# EAGLE board Add-OnV15 (EAGLE 6.3)
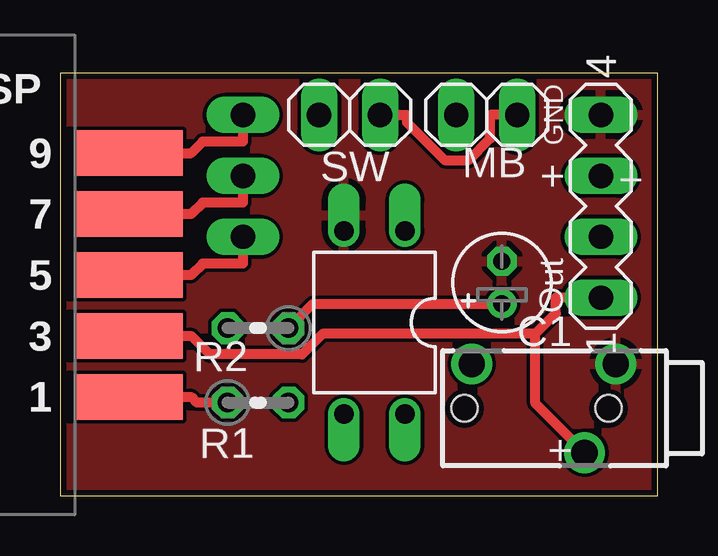
[diagram p0: board, top side]
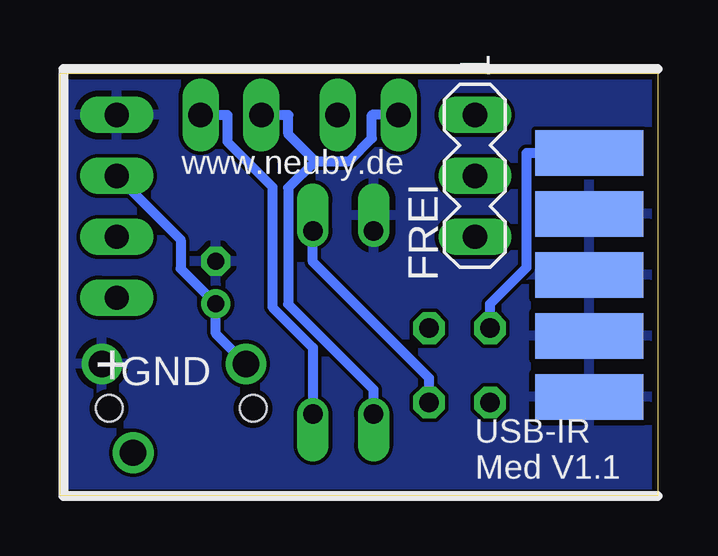
[diagram p1: board, bottom side, seen from below]

Size 24.91 x 17.61 mm. Coordinates in mm from the lower left corner, seen from the top.
Outline: 0,0 24.91,0 24.91,17.61 0,17.61 0,0
Copper layers (1*16): Top 0.035mm / dielectric 1.5mm / Bottom 0.035mm
Design rules "Fusion_eagle_rule_v1.1": minimum track width 6mil, minimum drill 12mil, track to track 6mil, track to pad 6mil, pad to pad 6mil, via to via 6mil, smd to smd 0mil, copper to edge 10mil, drill to drill 10mil, minimum pad ring 10mil, minimum via ring 6mil, stop-mask expansion 2mil, vias tented up to drill 100mil, thermal gap 10mil
Net classes: 0 default: width 0.406 mm

## Footprints (pad centres in the part's own frame; a part is rotated, then mirrored left to right if it is on the bottom)
CON2X5EDGE = smd 4.5 x 1.9: P$1 0,5.08; P$3 0,2.54; P$5 0,0; P$7 0,-2.54; P$9 0,-5.08 | smd 4.5 x 1.9 bottom: P$2 0,5.08; P$4 0,2.54; P$6 0,0; P$8 0,-2.54; P$10 0,-5.08
E1,8-4 = drill 0.711 pad 1.168: + -0.889,0 | drill 0.711 pad 1.168 octagon: - 0.889,0
MA03-1 = drill 1.016 long: 1 -2.54,0; 2 0,0; 3 2.54,0
1X02 = drill 1.016 long: 1 -1.27,0; 2 1.27,0
DIL04 = drill 0.813 offset: 1 -1.27,-3.81; 2 1.27,-3.81; 3 1.27,3.81; 4 -1.27,3.81
0204V = drill 0.813 octagon: 1 -1.27,0; 2 1.27,0
MA04-1 = drill 1.016 long: 1 -3.81,0; 2 -1.27,0; 3 1.27,0; 4 3.81,0
1501_03 = drill 1.1 pad 1.7: 1 -1.85,0.3; 2 1.85,-1; 3 -1.85,-5.7 | hole 1.1: 0,0; 0,-6

## Placement (x,y rotation side)
2USB-ASP  CON2X5EDGE  [CON2X5EDGE]  2.86,9.21 180 top
C1  4,7uF  [E1,8-4]  18.41,8.89 90 top
FREI  [MA03-1]  7.62,13.34 270 bottom
MB  [1X02]  17.78,15.88 0 top
OK2  PC817  [DIL04]  13.1,7.22 180 top
R1  100  [0204V]  8.26,3.89 0 top
R2  560  [0204V]  8.26,6.99 180 top
SV1  [MA04-1]  22.54,12.06 90 top
SW  [1X02]  12.06,15.88 180 top
X1  1501_03  [1501_03]  22.86,3.65 270 top

## Library data of the parts
2USB-ASP = schwen
C1 R1 R2 = rcl
FREI SV1 = con-lstb; OC_FARNELL: unknown; OC_NEWARK: unknown
MB SW = pinhead
OK2 = optocoupler; MPN: PC817X4J000F; OC_FARNELL: 9707727; OC_NEWARK: 97K7059
X1 = con-lumberg; OC_FARNELL: 1200127; OC_NEWARK: unknown

## Nets
GND: 2USB-ASP.P$2 2USB-ASP.P$4 2USB-ASP.P$6 2USB-ASP.P$8 C1.- OK2.2 SV1.4 X1.1
MISO: 2USB-ASP.P$1 R1.1
MOSI: 2USB-ASP.P$9 FREI.1
N$1: C1.+ R2.1 SV1.3 X1.3
N$2: OK2.1 R1.2
N$3: MB.2 OK2.4 SW.1
N$4: MB.1 OK2.3 SW.2
NC: 2USB-ASP.P$7 FREI.2
RST: 2USB-ASP.P$5 FREI.3
SCK: 2USB-ASP.P$3 SV1.1 X1.2
VCC: 2USB-ASP.P$10 R2.2

## Tracks (layer width: path | path; a pad name or v marks a point on that pad's centre or on a via)
GND
  pour Bottom: 0,17.78 0,0 24.77,0 24.77,17.78
  pour Top: 0,17.78 24.77,17.78 24.77,0 0,0
MISO
  Top 0.406: 2USB-ASP.P$1 5.47,4.12 5.7,3.89 R1.1
MOSI
  Top 0.406: 2USB-ASP.P$9 5.47,14.29 5.94,14.76 7.62,14.76 FREI.1
N$1
  Top 0.406: R2.1 10.54,8 C1.+
  Bottom 0.406: X1.3 18.41,6.75 C1.+ 19.88,9.47 19.88,10.68 SV1.3
N$2
  Bottom 0.406: R1.2 9.53,4.91 14.37,9.75 OK2.1
N$3
  Top 0.406: MB.2 17.93,15.88 17.93,14.9 17.02,13.99 16.03,13.99 14.45,15.56 14.45,15.88 SW.1
  Bottom 0.406: MB.2 17.93,15.88 17.93,14.76 16.05,12.88 16.05,7.86 14.37,6.18 OK2.4
N$4
  Bottom 0.406: 14.28,13.95 15.39,12.83 15.39,7.99 11.83,4.43 OK2.3 | 14.28,13.95 12.86,13.95 11.91,14.9 11.91,15.88 SW.2 | 14.28,13.95 15.39,15.07 15.39,15.88 MB.1
NC
  Top 0.406: 2USB-ASP.P$7 5.47,11.74 5.94,12.22 7.62,12.22 FREI.2
RST
  Top 0.406: 2USB-ASP.P$5 5.47,9.21 5.94,9.68 7.62,9.68 FREI.3
SCK
  Top 0.406: SV1.1 20.66,8.26 20.66,7.6 19.8,6.75 | X1.2 19.8,3.85 19.8,6.75 | 19.8,6.75 10.94,6.75 10.09,5.89 6.24,5.89 5.47,6.67 2USB-ASP.P$3
VCC
  Bottom 0.406: 2USB-ASP.P$10 5.47,14.29 5.47,9.52 6.99,8 R2.2

## Text on the board
tNames: GND | + | + | Out | +
bNames: www.neuby.de | + | GND | USB-IR / Med V1.1